# Altium PCB Manchester_Solo.PcbDoc
Units mm, origin at the board's own origin, x right, y up, seen from the top; angles counter-clockwise.
Board outline 40 x 40.9 mm, 2 copper layers (Top Layer, Bottom Layer); 9 components, 9 nets, 29 pads, 0 vias.
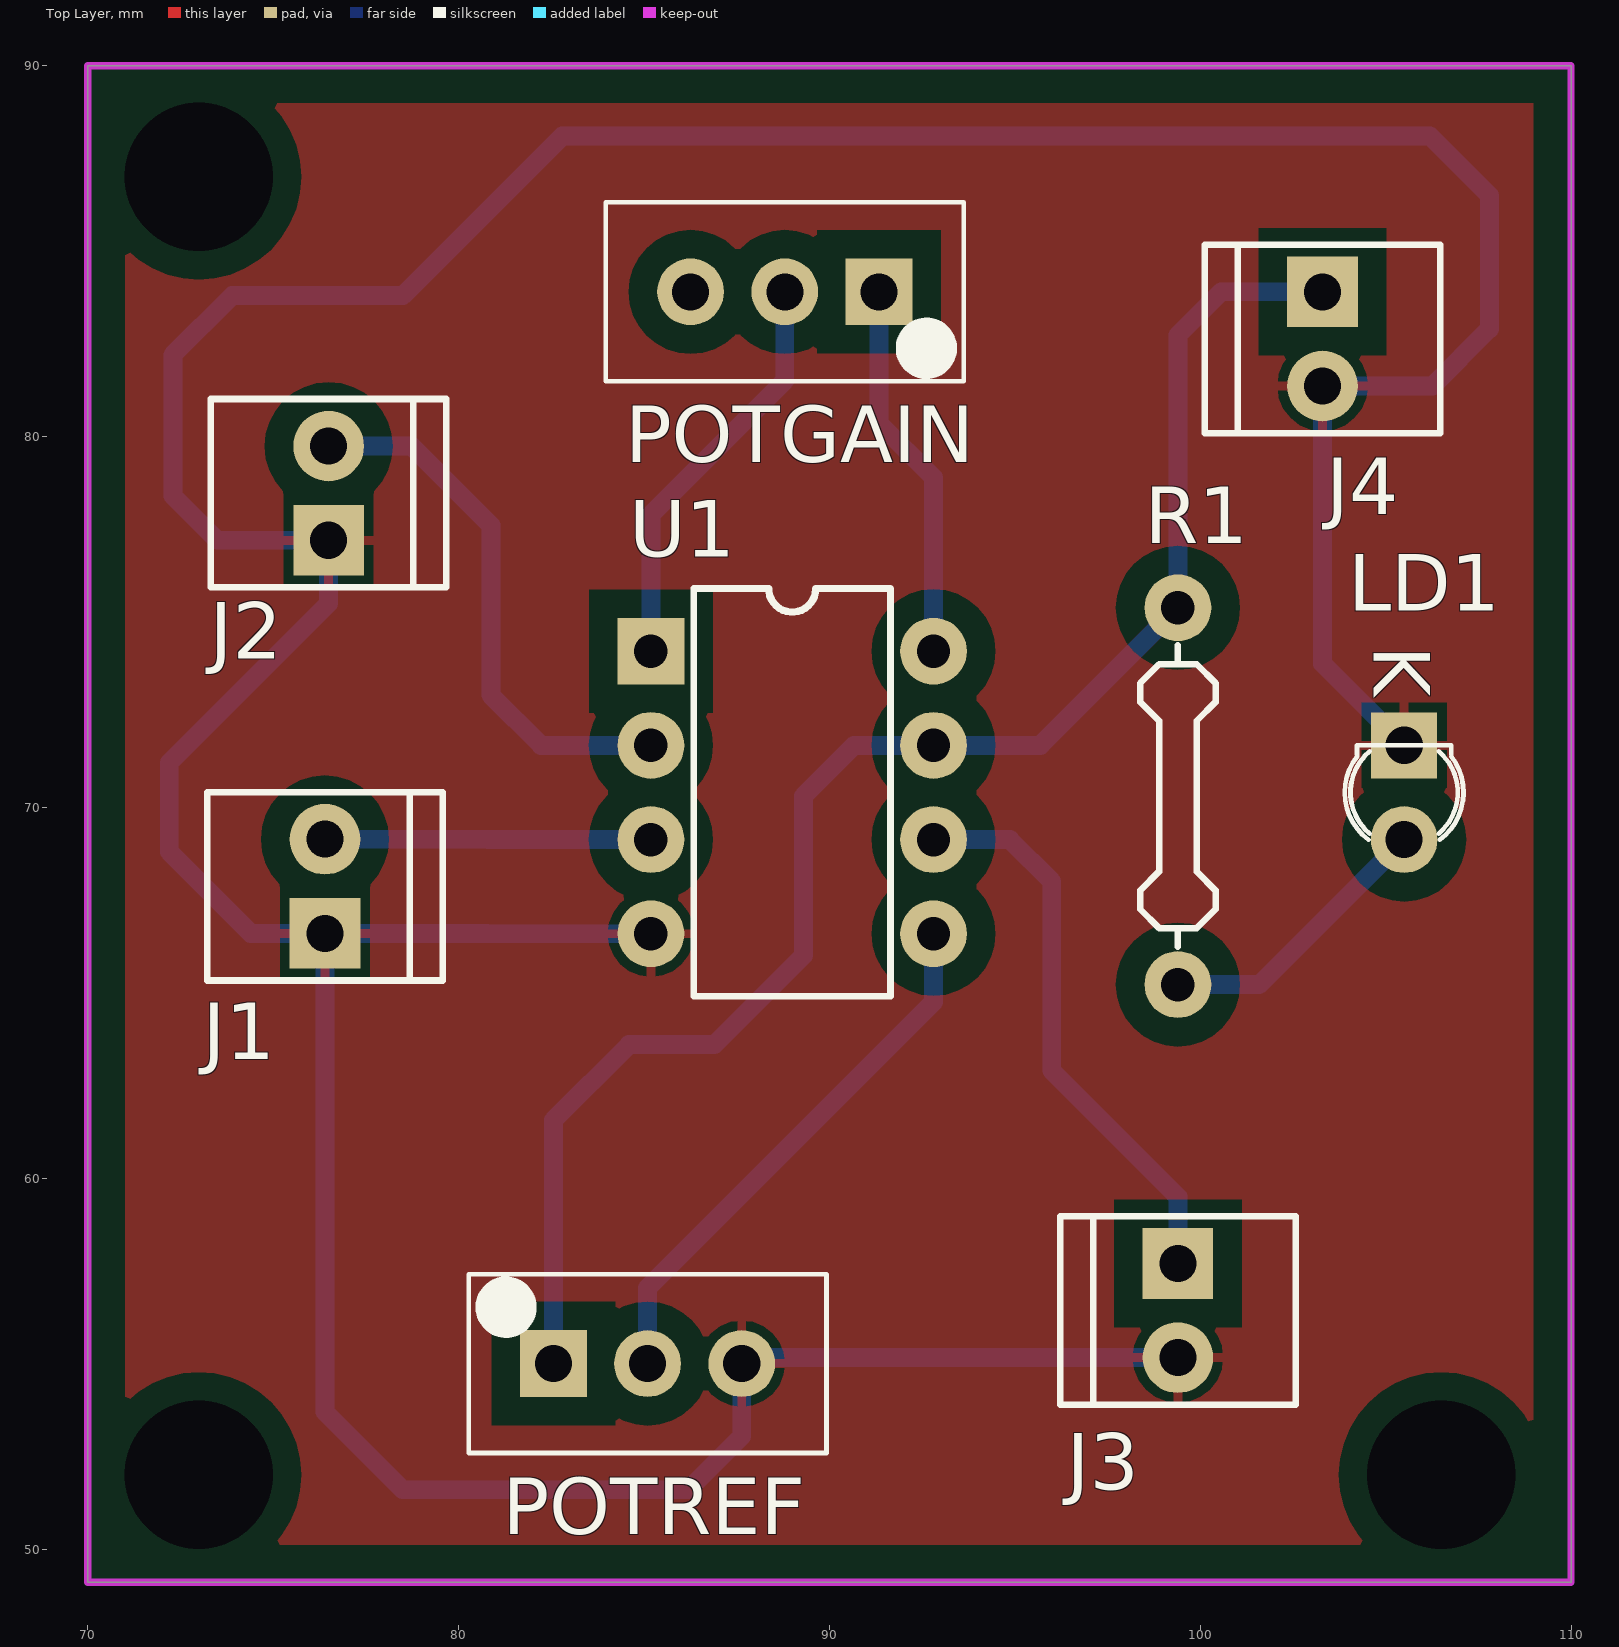
[diagram p0: Top Layer view]
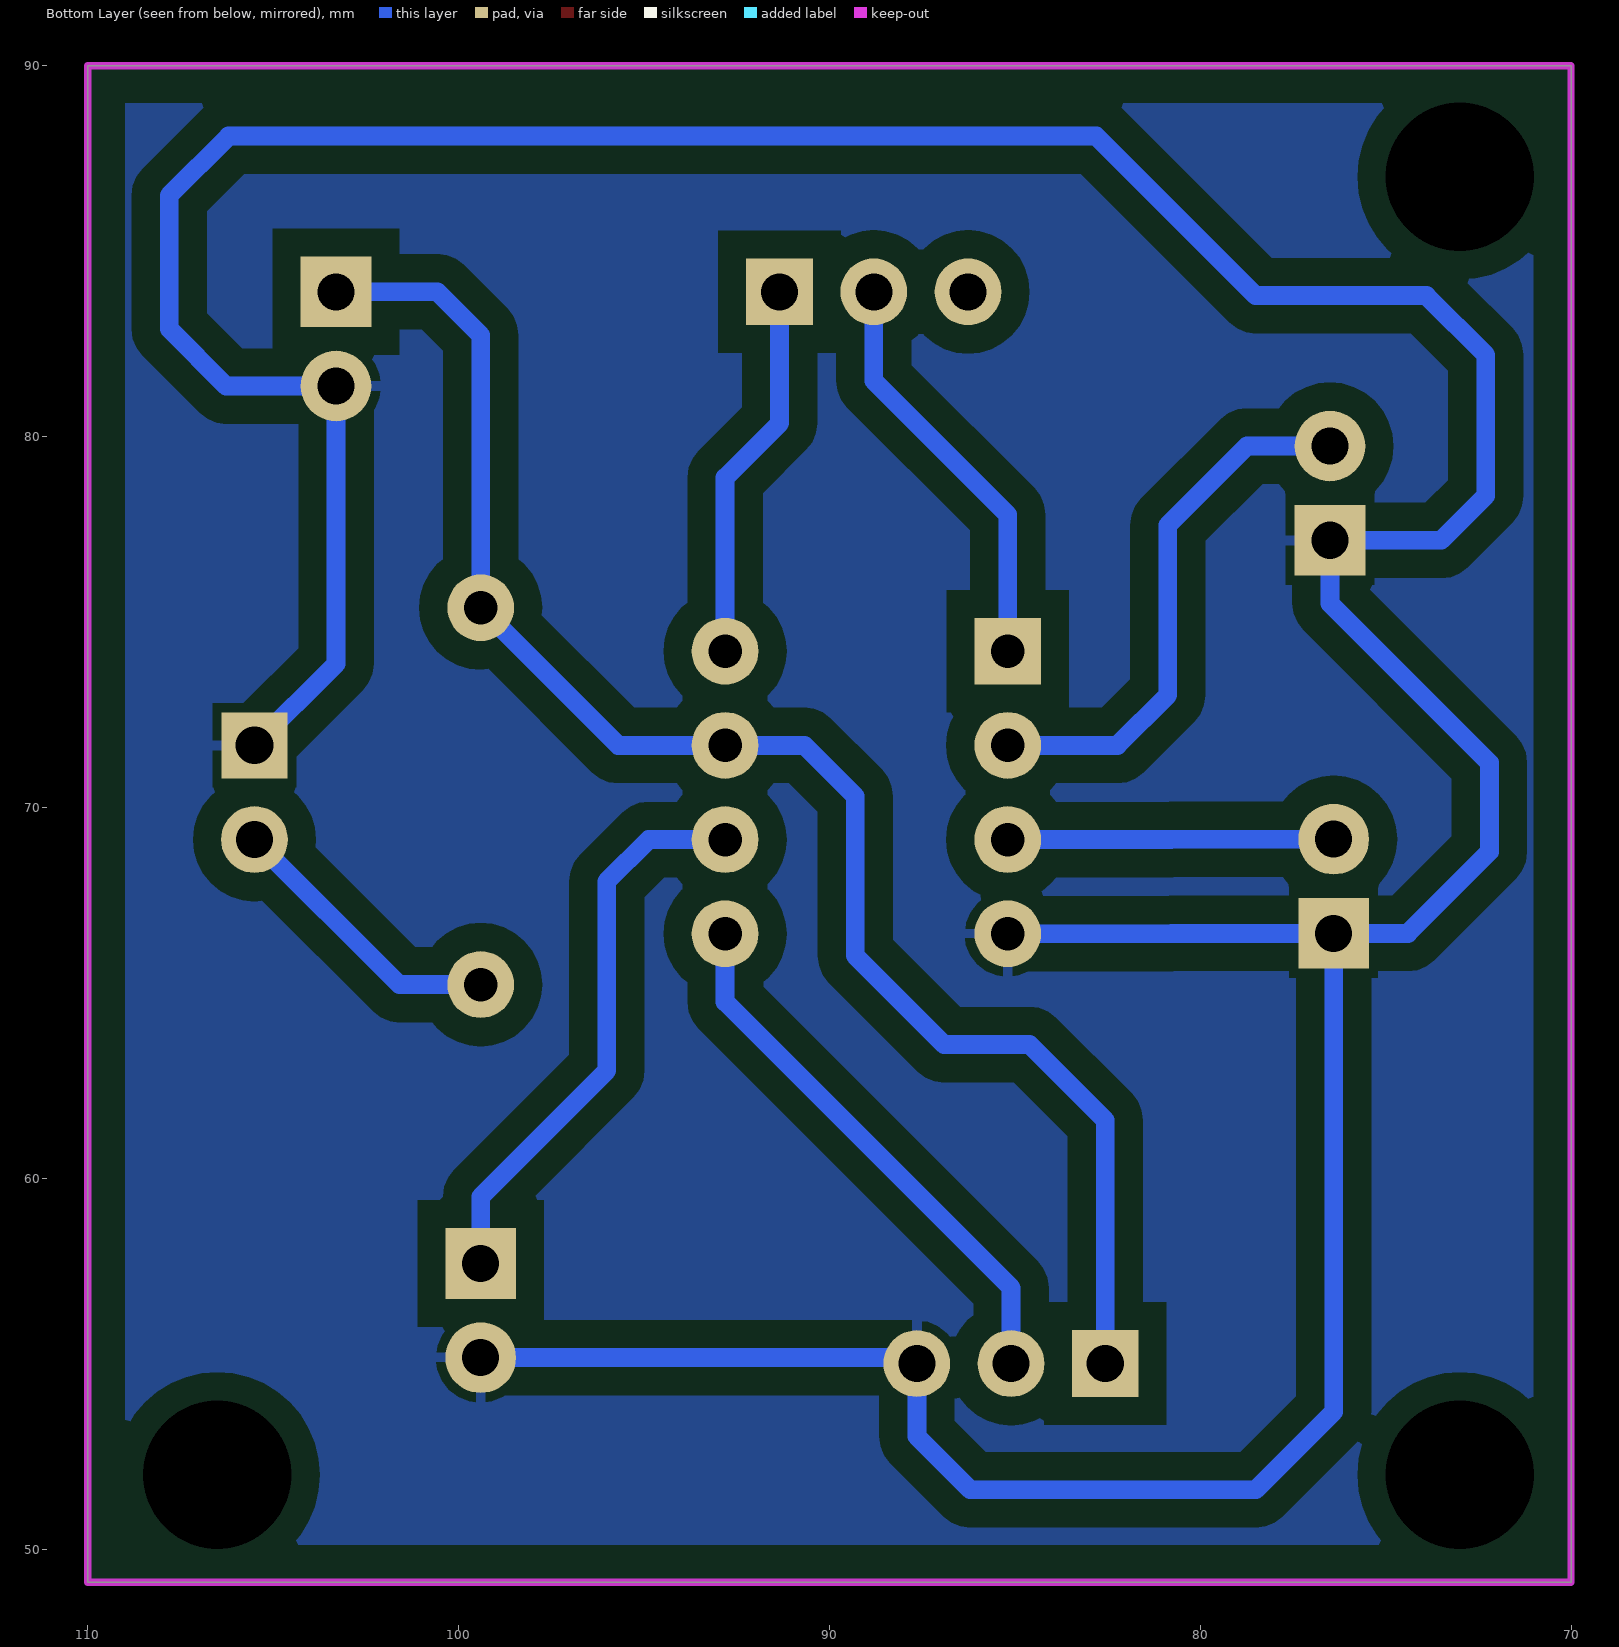
[diagram p1: Bottom Layer view, seen from below]

## Layer stack, top to bottom
Top Solder: solder mask 0.0102, Solder Resist, Dk 3.5
Top Layer: signal copper 0.0356
Dielectric 1: dielectric 0.32, FR-4, Dk 4.8
Bottom Layer: signal copper 0.0356
Bottom Solder: solder mask 0.0102, Solder Resist, Dk 3.5

## Board outline
70,49.1 110,49.1 110,90 70,90

## Design rules (kind name [scope] priority, off if disabled: settings)
Clearance [All] p1: gap=0.762
ComponentClearance [All] p1 off: gap=0.254 collisioncheckmode=3 verticalgap=0.254 showdistances=FALSE
PolygonConnect [All] p1: connectstyle=Relief reliefconductorwidth=0.254 reliefentries=4 polygonreliefangle="90 Angle" airgapwidth=0.254
RoomDefinition Manchester [InComponentClass('Manchester')] p1: confinementstyle=ConfineIn formatcopy=TRUE lockcomponents=FALSE outline 111.2,46.6 185.1,46.6 185.1,61.6 111.2,61.6
RoutingLayers [All] p1: top layer_v5=FALSE bottom layer_v5=TRUE
RoutingVias [All] p1: holewidth=0.711 width=1.27 viastyle="Through Hole" minholewidth=0.711 minwidth=1.27 maxholewidth=0.711 maxwidth=1.27
SolderMaskExpansion [All] p1: expansion=0.102
Width [All] p1: maxlimit=0.508 minlimit=0.508 preferedwidth=0.508
28 further rules are at their usual default settings.

## Components (designator, comment, footprint, x,y, rotation, side; value= is the part's Value field where it differs from the comment)
J1 "Input" MTA100-2 76.4,66.6 r0 top
J2 "Input" MTA100-2 76.5,77.2 r0 top
J3 "Input" MTA100-2 99.4,57.7 r180 top
J4 "Input" MTA100-2 103.3,83.9 r180 top
LD1 "Power Good" "LED 3mm Vertical" 105.5,70.4 r180 top
POTGAIN "?????" VR1 88.8,83.9 r180 top
POTREF "?????" VR1 85.1,55 r0 top
R1 "Res 1/4W" "Axial 0.4\" Step" 99.4,70.3 r270 top
U1 "OpAmp Single" DIP8 89,70.4 r270 top

## Footprints (in the part's own frame and the unit in brackets; to place one, negate y for a bottom-side part, rotate by r counter-clockwise, add the part's x,y. Pads: shape width x height; smd on the part's side, far side on the other; paste and mask are expansions set on the pad)
"Axial 0.4\" Step" [mm] "Axial 3D Step"
  round 1.8 hole 0.9: 1(-5.08,0) 2(5.08,0)
  silkscreen extent -4.06,-1.02 4.06,1.02, body extent -5.38,-1.16 5.38,1.16, height 2.93
DIP8 [mm] "DIP8"
  rect 1.8x1.8 hole 0.9: 1(-3.81,-3.81)
  round 1.8 hole 0.9: 2(-1.27,-3.81) 3(1.27,-3.81) 4(3.81,-3.81) 5(3.81,3.81) 6(1.27,3.81) 7(-1.27,3.81) 8(-3.81,3.81)
  silkscreen extent -5.5,-2.65 5.5,2.65, body extent -5.59,-4.19 5.59,4.19, height 2.54
"LED 3mm Vertical" [mm] "LED 3mm Vertical"
  round 1.8 hole 1: 1(0,1.27)
  rect 1.778x1.778 hole 1.016: 2(0,-1.27)
  silkscreen extent -1.6,-1.27 1.6,1.28, body extent -1.74,-1.91 1.75,1.75, height 6.15
MTA100-2 [mm] "MTA100-2 M"
  rect 1.905x1.905 hole 1: 1(0,0)
  round 1.905 hole 1: 2(0,2.54)
  silkscreen extent -3.18,-1.27 3.17,3.81, body extent -3.18,-1.27 3.17,3.81, height 2.54
VR1 [mm] "Trim 10T Vertical"
  rect 1.8x1.8 hole 1: 1(-2.54,0)
  round 1.8 hole 1: 2(0,0) 3(2.54,0)
  silkscreen extent -4.83,-2.41 4.83,2.41, body extent -4.83,-2.41 4.83,2.41, height 12.14

## Part data
J1 J2 J3 J4: library part MTA100-2, "MTA Male 0 Degres"
LD1: library part "LED 3mm Vertical", "Through Hole"
POTGAIN POTREF: library part "Res Pot 10T Vertical"
R1: "Resistor"

## Free pads (board coordinates)
  round 1 hole 4: 0(73,87) 1(73,52) 2(106.5,52)

## Nets (pads, with @x,y where several pads share a name; then routed paths per layer and width w, separated by ;. In a path a pad name is that pad's centre, name@x,y a point inside that pad or via, vN(x,y) a via of type N, cw(c..) or ccw(c..) an arc to the next point about the centre after c; other vN are vias at no path point)
GND: J1.1 J2.1 J3.2 J4.2 LD1.2 POTREF.3 U1.4 | length 129.9
  Bottom Layer w0.508: U1.4 80.782,66.59 80.772,66.6 J1.1 ; J3.2 87.8,55.16 POTREF.3 87.64,53.04 86.2,51.6 78.5,51.6 76.4,53.7 J1.1 ; LD1.2 103.3,73.87 J4.2 106.26,81.36 107.8,82.9 107.8,86.5 106.2,88.1 82.8,88.1 78.5,83.8 73.9,83.8 72.3,82.2 72.3,78.4 73.5,77.2 J2.1 76.5,75.5 72.2,71.2 72.2,68.8 74.4,66.6 J1.1
LEDREF: J2.2 U1.2 | length 14.7
  Bottom Layer w0.508: J2.2 78.74,79.74 80.874,77.606 80.874,73.026 82.23,71.67 U1.2
NetJ1_2: J1.2 U1.3 | length 8.8
  Bottom Layer w0.508: J1.2 80.772,69.14 80.782,69.13 U1.3
NetJ3_1: J3.1 U1.6 | length 15.4
  Bottom Layer w0.508: U1.6 94.87,69.13 96,68 96,62.9 99.4,59.5 J3.1
NetLD1_1: LD1.1 R1.2 | length 7.7
  Bottom Layer w0.508: R1.2 101.59,65.22 LD1.1
NetPOTGAIN_1: POTGAIN.1 U1.8 | length 10.3
  Bottom Layer w0.508: POTGAIN.1 91.34,80.36 92.81,78.89 U1.8
NetPOTGAIN_2: POTGAIN.2 U1.1 | length 11.2
  Bottom Layer w0.508: U1.1 85.19,77.89 88.8,81.5 POTGAIN.2
REF: POTREF.2 U1.5 | length 14.8
  Bottom Layer w0.508: POTREF.2 85.1,57.043 92.81,64.753 U1.5
VCC: J4.1 POTREF.1 R1.1 U1.7 | length 43.4
  Bottom Layer w0.508: POTREF.1 82.56,61.56 84.6,63.6 86.9,63.6 89.3,66 89.3,70.3 90.67,71.67 U1.7 95.69,71.67 R1.1 99.4,82.731 100.569,83.9 J4.1
pads on no net: POTGAIN.3

## Polygon pours and split planes (outlines as drawn)
GND on Top Layer "Top Layer-No Net" (solid, pour order 2): 70,90 70,49.1 110,49.1 110,90
GND on Bottom Layer "Top Layer-No Net" (solid, pour order 4): 70,90 70,49.1 110,49.1 110,90

## Keep-outs
Keep-Out Layer:
  the board outline again, w0.2

## Silkscreen, mask and mechanical layers (free items; w line width, h text height)
Mechanical 1:
  text "POTGAIN" at 83.9,87.2 h1.52
  text "ALIM" at 100.7,86.1 h1.52
  text "LEDREF" at 72.7,82 h1.52
  text "IN" at 75.2,71.8 h1.52
  text "OUT" at 97.5,60 h1.52
  text "POTREF" at 81.2,58.7 h1.52

## Text inside footprints (layer, text, board x,y; h text height)
LD1: Top Overlay "K" at 104.687,74.362 h1.52 r270